# Altium PCB PCB_OnAp_V1.PcbDoc
Units mil, origin at the board's own origin, x right, y up, seen from the top; angles counter-clockwise.
Board outline 1585.03 x 810.03 mil, 2 copper layers (Top Layer, Bottom Layer); 12 components, 6 nets, 51 pads, 0 vias.
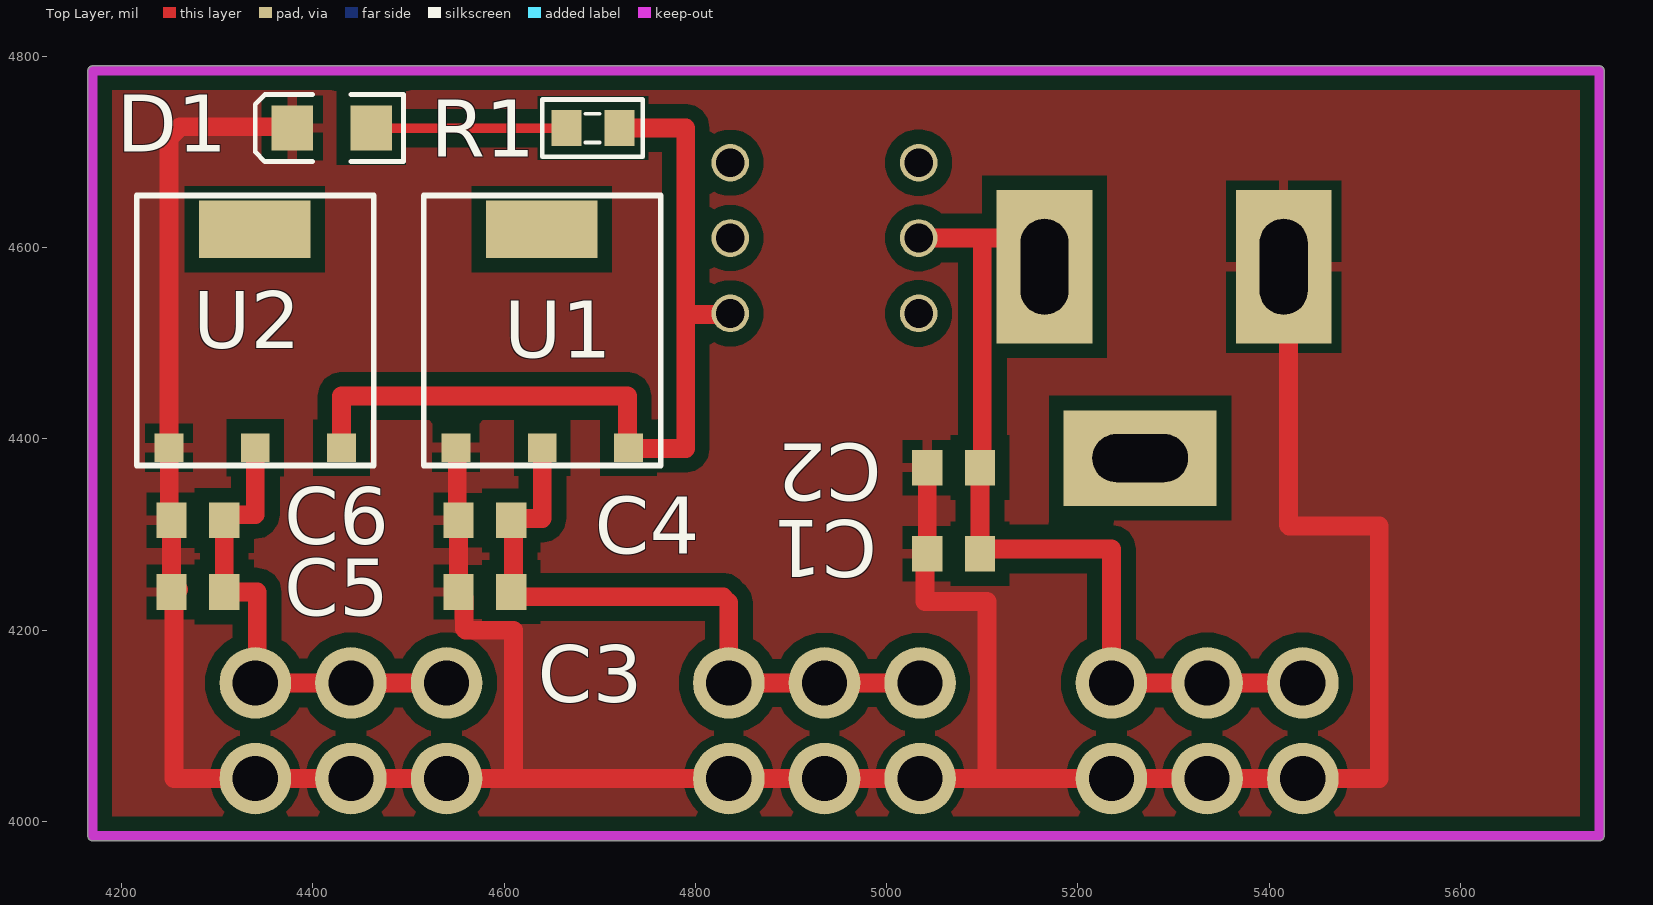
[diagram p0: Top Layer view]
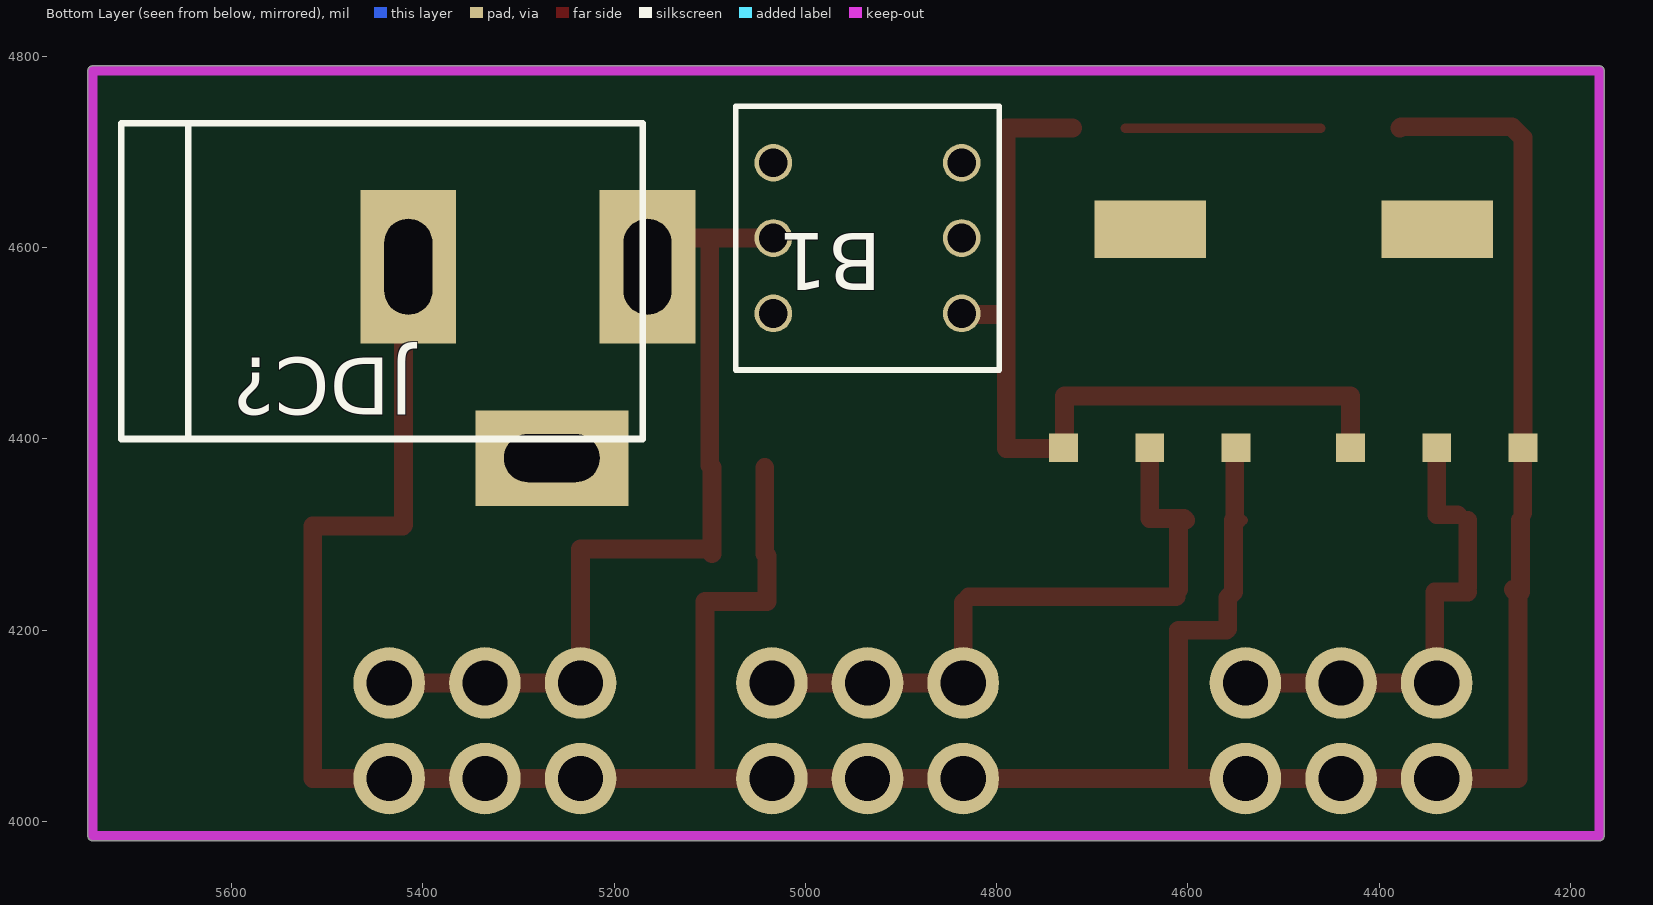
[diagram p1: Bottom Layer view, seen from below]

## Layer stack, top to bottom
Top Solder: solder mask 0.4, Solder Resist, Dk 3.5
Top Layer: signal copper 1.4
Dielectric 1: dielectric 12.6, FR-4, Dk 4.8
Bottom Layer: signal copper 1.4
Bottom Solder: solder mask 0.4, Solder Resist, Dk 3.5

## Board outline
4164.98,3985 4164.98,4785 cw(c4170,4785) 4170,4790.02 5745,4790.02 cw(c5745,4785) 5750.02,4785 5750.02,3985 cw(c5745,3985) 5745,3979.99 4170.03,3979.99 cw(c4170,3985)

## Design rules (kind name [scope] priority, off if disabled: settings)
Clearance [All] p1: gap=15 ignorepadtopadclearanceinfootprint=FALSE except(0: Arc-Hole Track-Hole SMDPad-Hole THPad-Hole Via-Hole Fill-Hole Poly-Hole Region-Hole Text-Hole; 10: SMDPad-SMDPad Text-Text; 20: Arc-Arc Arc-Track Arc-SMDPad Track-Track Track-SMDPad)
PolygonConnect [All] p1: connectstyle=Relief reliefconductorwidth=10 reliefentries=4 polygonreliefangle="90 Angle" airgapwidth=10
RoomDefinition Sch_OnAp_V1 [InComponentClass('Sch_OnAp_V1')] p1: confinementstyle=ConfineIn formatcopy=TRUE lockcomponents=FALSE outline 4170,3985 5745,3985 5745,4785 4170,4785
RoutingVias [InNetClass('Power')] p1: holewidth=28 width=50 viastyle="Through Hole" minholewidth=28 minwidth=50 maxholewidth=28 maxwidth=50
SolderMaskExpansion [All] p1: expansion=4 istentingtop=FALSE
Width [All] p1: maxlimit=39.37 minlimit=10 preferedwidth=19.68
30 further rules are at their usual default settings.

## Classes and differential pairs
net class Power: GND NetB1_2 NetB1_4 NetC3_1 NetC5_1

## Components (designator, comment, footprint, x,y, rotation, side; value= is the part's Value field where it differs from the comment)
B1 "Push_Button" Button_6Pin 4935,4610 r180 bottom
C1 "Cap Non-Pol SMD" CAP-SM-0603 5070,4280 r0 top value=1uF
C2 "Cap Non-Pol SMD" CAP-SM-0603 5070,4370 r0 top
C3 "Cap Non-Pol SMD" CAP-SM-0603 4580,4240 r180 top value=0.1uF
C4 "Cap Non-Pol SMD" CAP-SM-0603 4580,4315 r180 top value=1uF
C5 "Cap Non-Pol SMD" CAP-SM-0603 4280,4240 r180 top value=0.1uF
C6 "Cap Non-Pol SMD" CAP-SM-0603 4280,4315 r0 top value=1uF
D1 "LED SMD" LED_0805_Blue 4420,4725 r180 top
JDC? "Jack DC" DC-IN 5290,4480 r180 bottom value="Jac DC"
R1 "RESISTOR SMD" RES-SM-0603 4720,4725 r180 top value=1K
U1 "AMS1117" AMS1117 4640,4505 r0 top
U2 "AMS1117" AMS1117 4340,4505 r0 top

## Footprints (in the part's own frame and the unit in brackets; to place one, negate y for a bottom-side part, rotate by r counter-clockwise, add the part's x,y. Pads: shape width x height; smd on the part's side, far side on the other; paste and mask are expansions set on the pad)
AMS1117 [mil]
  rect 30x30 all layers, no hole: 1(-90.16,-114.19) 2(0,-114.19) 3(90.16,-114.19)
  rect 116.14x60 all layers, no hole: 4(-0.57,114.19)
  silkscreen extent -124,-133 124,150, body extent -124,-128 124,148, height 63
Button_6Pin [mm]
  round 1 hole 0.762: 1(-2.5,2) 2(-2.5,0) 3(-2.5,-2) 4(2.5,-2) 5(2.5,0) 6(2.5,2)
  silkscreen extent -3.5,-3.5 3.5,3.5
CAP-SM-0603 [mm] "SMD Ceramic Capacitor Size 0603"
  rect 0.8x0.95 smd: 1(-0.7,0) 2(0.7,0)
  body extent -0.85,-0.45 0.85,0.45, height 0.6
DC-IN [mil] "Jac DC input"
  rect 100x160 hole 50 slot 100 at 90 deg: 1(125,100) 2(-125,100)
  rect 160x100 hole 50 slot 100 at 0 deg: 3(25,-100)
  silkscreen extent -425,-80 120,250, body extent -410,-105 134,269, height 434
LED_0805_Blue [mm] "Chip LED, 2-Leads, Body 2.0x1.3mm, IPC Medium Density"
  rect 1.1x1.2 smd: 1(-1.05,0) 2(1.05,0)
  silkscreen extent -1.91,-0.89 2.03,0.89, body extent -1,-0.63 1,0.62, height 0.68
RES-SM-0603 [mm]
  rect 0.8x0.95 smd: 1(-0.014,0) 2(1.386,0)
  silkscreen extent -0.64,-0.76 2.03,0.76, body extent -0.11,-0.4 1.49,0.4, height 0.3

## Part data
C1 C2 C3 C4 C5 C6: "Capacitor"
  C2: C2=0.1uF
D1: "LED"
JDC?: "Jack DC input"
R1: "Resistor"

## Free pads (board coordinates)
  round 74.8 hole 47.24: 11(4340,4145) 11(4835,4145) 11(5235,4145) 12(4440,4145) 12(4935,4145) 12(5335,4145) 13(4540,4145) 13(5035,4145) 13(5435,4145) 16(4340,4045) 16(4835,4045) 16(5235,4045) 17(4440,4045) 17(4935,4045) 17(5335,4045) 18(4540,4045) 18(5035,4045) 18(5435,4045)

## Nets (pads, with @x,y where several pads share a name; then routed paths per layer and width w, separated by ;. In a path a pad name is that pad's centre, name@x,y a point inside that pad or via, vN(x,y) a via of type N, cw(c..) or ccw(c..) an arc to the next point about the centre after c; other vN are vias at no path point)
GND: C1.1 C2.1 C3.2 C4.2 C5.2 C6.1 D1.2 JDC?.2 pad.16 pad.17 pad.18 U1.1 U2.1 | length 3500.7
  Top Layer w10: U2.1 U2.1@4250,4390.96 ; C4.2@4545,4312.44 4542.44,4315 C4.2@4549.84,4322.4 ; C1.1@5040,4277.56 C1.1 ; 5099.14,4045 5105,4050.86 ; JDC?.2 5415,4575 JDC?.2@5420,4570
  Top Layer w19.68: U2.1 4249.84,4714.85 4261.37,4726.39 4377.28,4726.39 D1.2 ; C6.1@4250,4322.44 U2.1@4250,4390.96 ; C6.1 4252.44,4240.12 4255,4237.56 4255,4045 4340,4045 4440,4045 4540,4045 4610,4045 ; C5.2@4257.44,4240 C5.2@4260,4242.56 ; U1.1 4551.14,4389.51 4551.14,4316.3 C4.2 C3.2 4558.35,4234.09 4558.35,4201.65 4560,4200 4610,4200 4610,4045 ; C1.1@5040,4277.56 5040,4230 5105,4230 5105,4050.86 ; C1.1 C2.1 ; JDC?.2@5420,4570 5420,4310 5420.86,4309.14 5515,4309.14 5515,4045 5435,4045 5335,4045 5235,4045 5099.14,4045 5035,4045 4935,4045 4835,4045 4610,4045
NetB1_2: B1.2 C1.2 C2.2 JDC?.1 pad.11@5235,4145 pad.12@5335,4145 pad.13@5435,4145 | length 995.4
  Top Layer w10: C1.2 C1.2@5102.56,4285 ; C2.2 C2.2@5100,4372.44 ; JDC?.1@5155,4585 5160,4580 JDC?.1 5165,4605 JDC?.1@5170,4610 ; pad.12@5335,4145 5345,4145 5350,4150 pad.12@5355,4145
  Top Layer w19.68: B1.2 5100,4610 ; C1.2 C2.2 ; C2.2@5100,4372.44 5100,4610 ; C1.2@5102.56,4285 5235,4285 5235,4145 pad.12@5335,4145 ; JDC?.1@5170,4610 5100,4610 ; pad.12@5355,4145 pad.13@5435,4145
NetB1_4: B1.4 R1.1 U1.3 U2.3 | length 922.2
  Top Layer w10: U1.3 U1.3@4730.96,4390 ; 4790,4535.86 4795.86,4530 ; B1.4@4835.31,4530 B1.4
  Top Layer w19.68: U2.3 4430,4390.96 4430,4445 4729.14,4445 4729.14,4391.82 U1.3 ; R1.1 4790,4725 4790,4535.86 4790,4390 U1.3@4730.96,4390 ; 4795.86,4530 B1.4@4835.31,4530
NetC3_1: C3.1 C4.1 pad.11@4835,4145 pad.12@4935,4145 pad.13@5035,4145 U1.2 | length 707.5
  Top Layer w10: C3.1 C3.1@4612.56,4235 ; 4829.14,4235 4835,4229.14
  Top Layer w19.68: C4.1@4602.56,4315 4604.49,4316.93 4640,4316.93 U1.2 4637.5,4388.31 U1.2@4635.81,4390 ; C4.1 4610,4312.56 C3.1@4610,4242.68 ; C3.1@4612.56,4235 4829.14,4235 ; 4835,4229.14 4835,4145 4935,4145 pad.13@5035,4145
NetC5_1: C5.1 C6.2 pad.11@4340,4145 pad.12@4440,4145 pad.13@4540,4145 U2.2 | length 498.8
  Top Layer w19.68: C5.1 C5.1@4312.56,4240 ; C6.2 4307.56,4245 C5.1@4312.56,4240 ; C6.2@4318.42,4320.86 4340,4320.86 U2.2 ; pad.13@4540,4145 4440,4145 4340,4145 4341.98,4146.98 4341.98,4240 C5.1@4312.56,4240
NetD1_1: D1.1 R1.2 | length 204.1
  Top Layer w10: D1.1 R1.2
pads on no net: B1.1 B1.3 B1.5 B1.6 JDC?.3 U1.4 U2.4

## Polygon pours and split planes (outlines as drawn)
GND on Top Layer "GND_L01_P000" (solid, pour order 0): 4165,4790 5745,4790 5745,3985 5740,3980 4165,3980 4170,3985 4170,4785

## Keep-outs
Keep-Out Layer:
  lines w10: 4170,3985 5745,3985 5745,4785 4170,4785 4170,3985

## Silkscreen, mask and mechanical layers (free items; w line width, h text height)
Dimension:
  lines w10: 4065.37,4729.88 4085,4790 ; 4069.63,4034.88 4090,3975 ; 4075,4789.94 4095,4790.06 ; 4080,3974.94 4100,3975.06 ; 4085.32,4738.38 4085,4790 ; 4089.68,4026.62 4090,3975 ; 4105.37,4730.12 4085,4790 ; 4109.63,4035.12 4090,3975 ; 4164.94,4835 4165.06,4855 ; 4224.87,4824.62 4165,4845 ; 4225.12,4864.62 4165,4845 ; 4566.63,4842.47 4165,4845 ; 5348.37,4837.53 5750,4835 ; 5689.88,4815.38 5750,4835 ; 5690.13,4855.38 5750,4835 ; 5749.94,4825 5750.06,4845
  text "1585.032 (mil)" at 4576.4,4806.41 h60 r359.64
  text "815.015 (mil)" at 4049.39,4728.16 h60 r270.35